# Altium PCB PCB_fin.PcbDoc
Units mil, origin at the board's own origin, x right, y up, seen from the top; angles counter-clockwise.
Board outline 4000 x 3500 mil, 2 copper layers (Top Layer, Bottom Layer); 13 components, 18 nets, 82 pads, 1 vias.
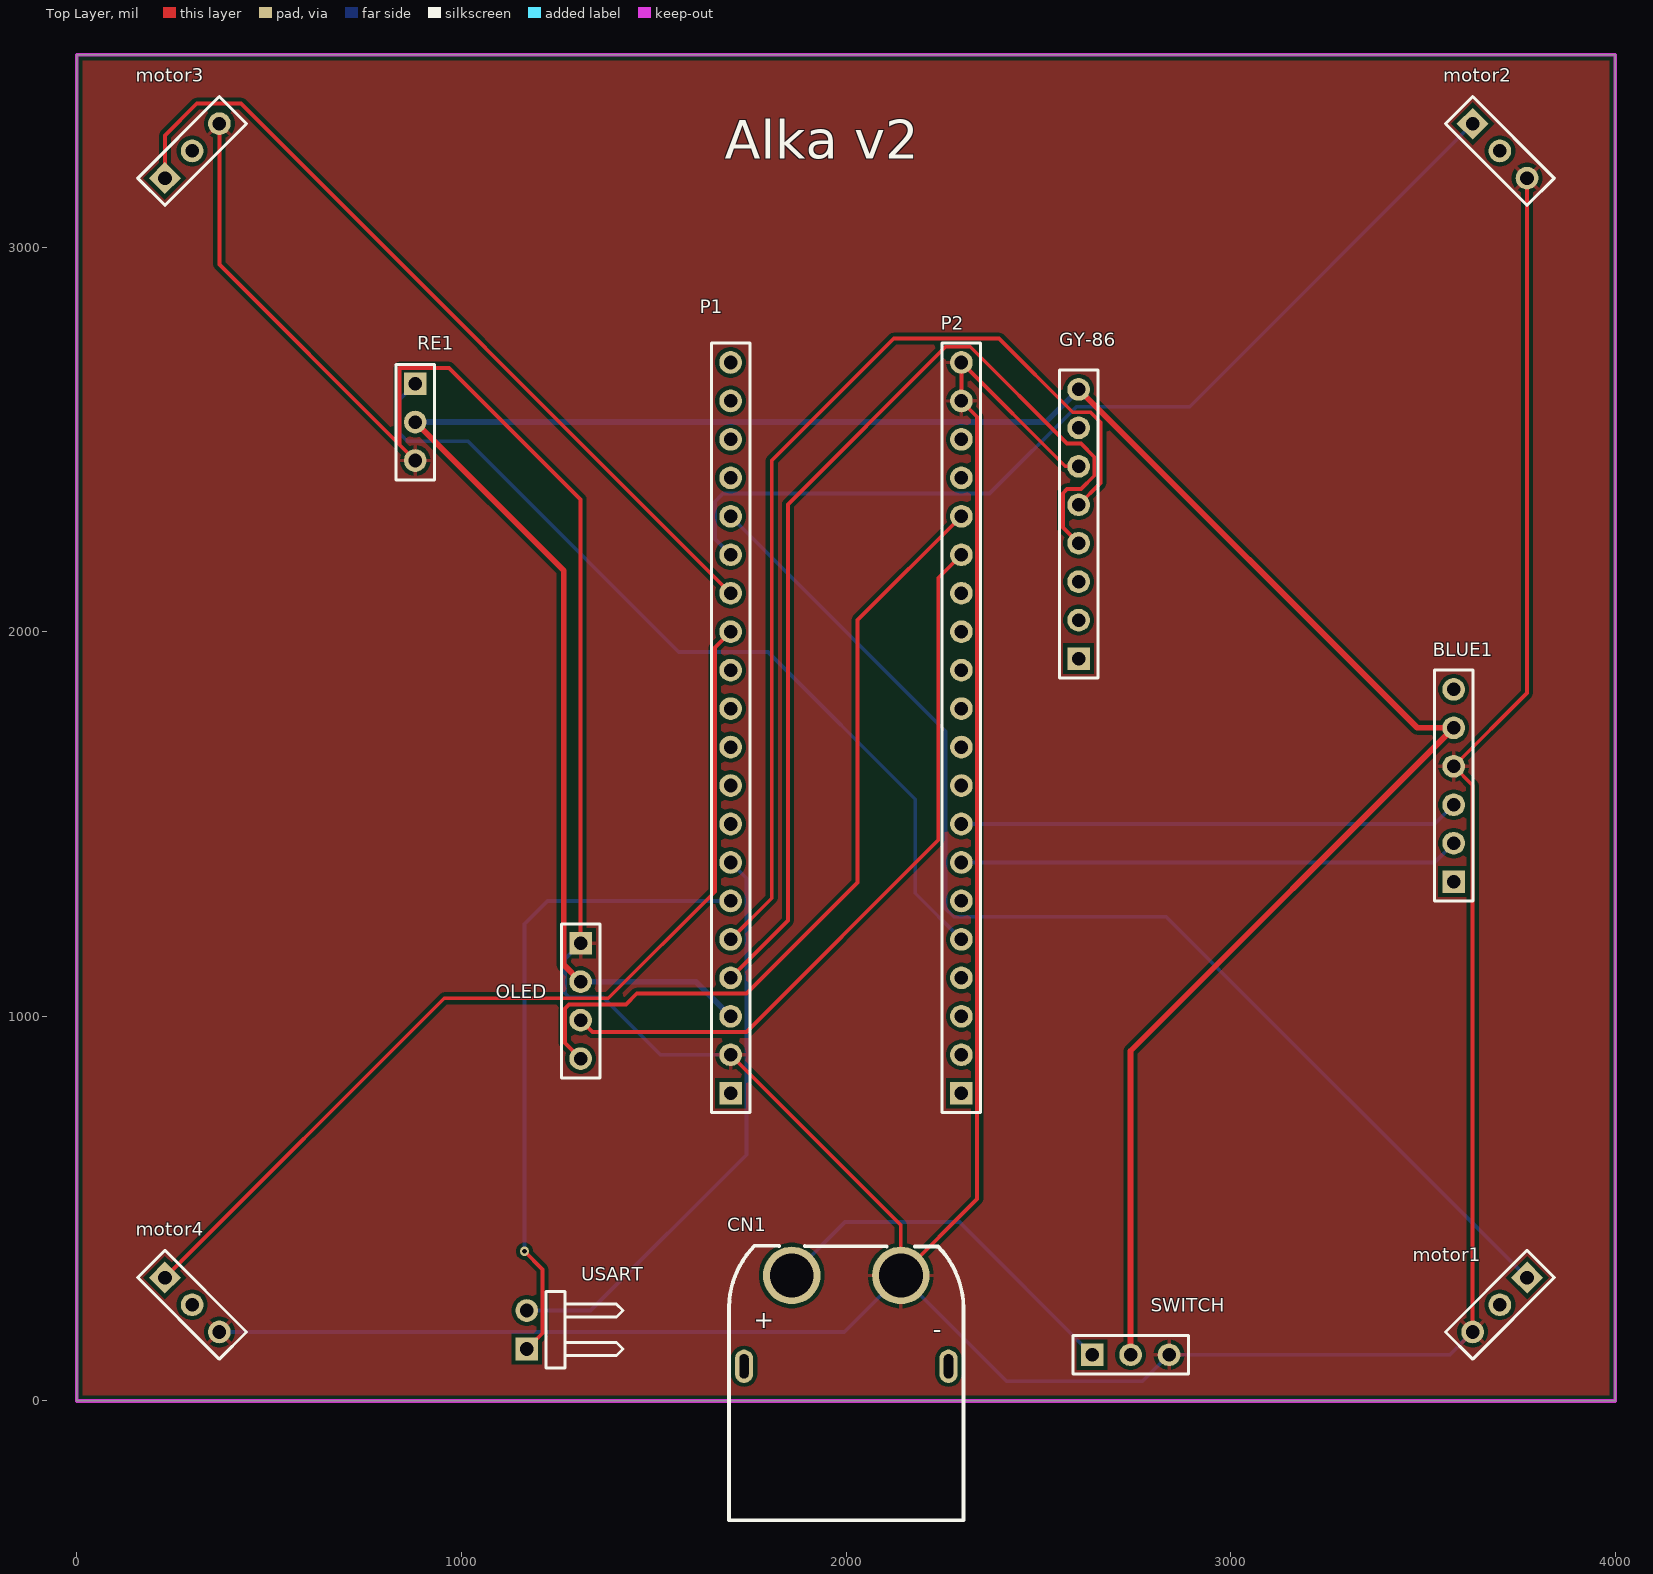
[diagram p0: Top Layer view]
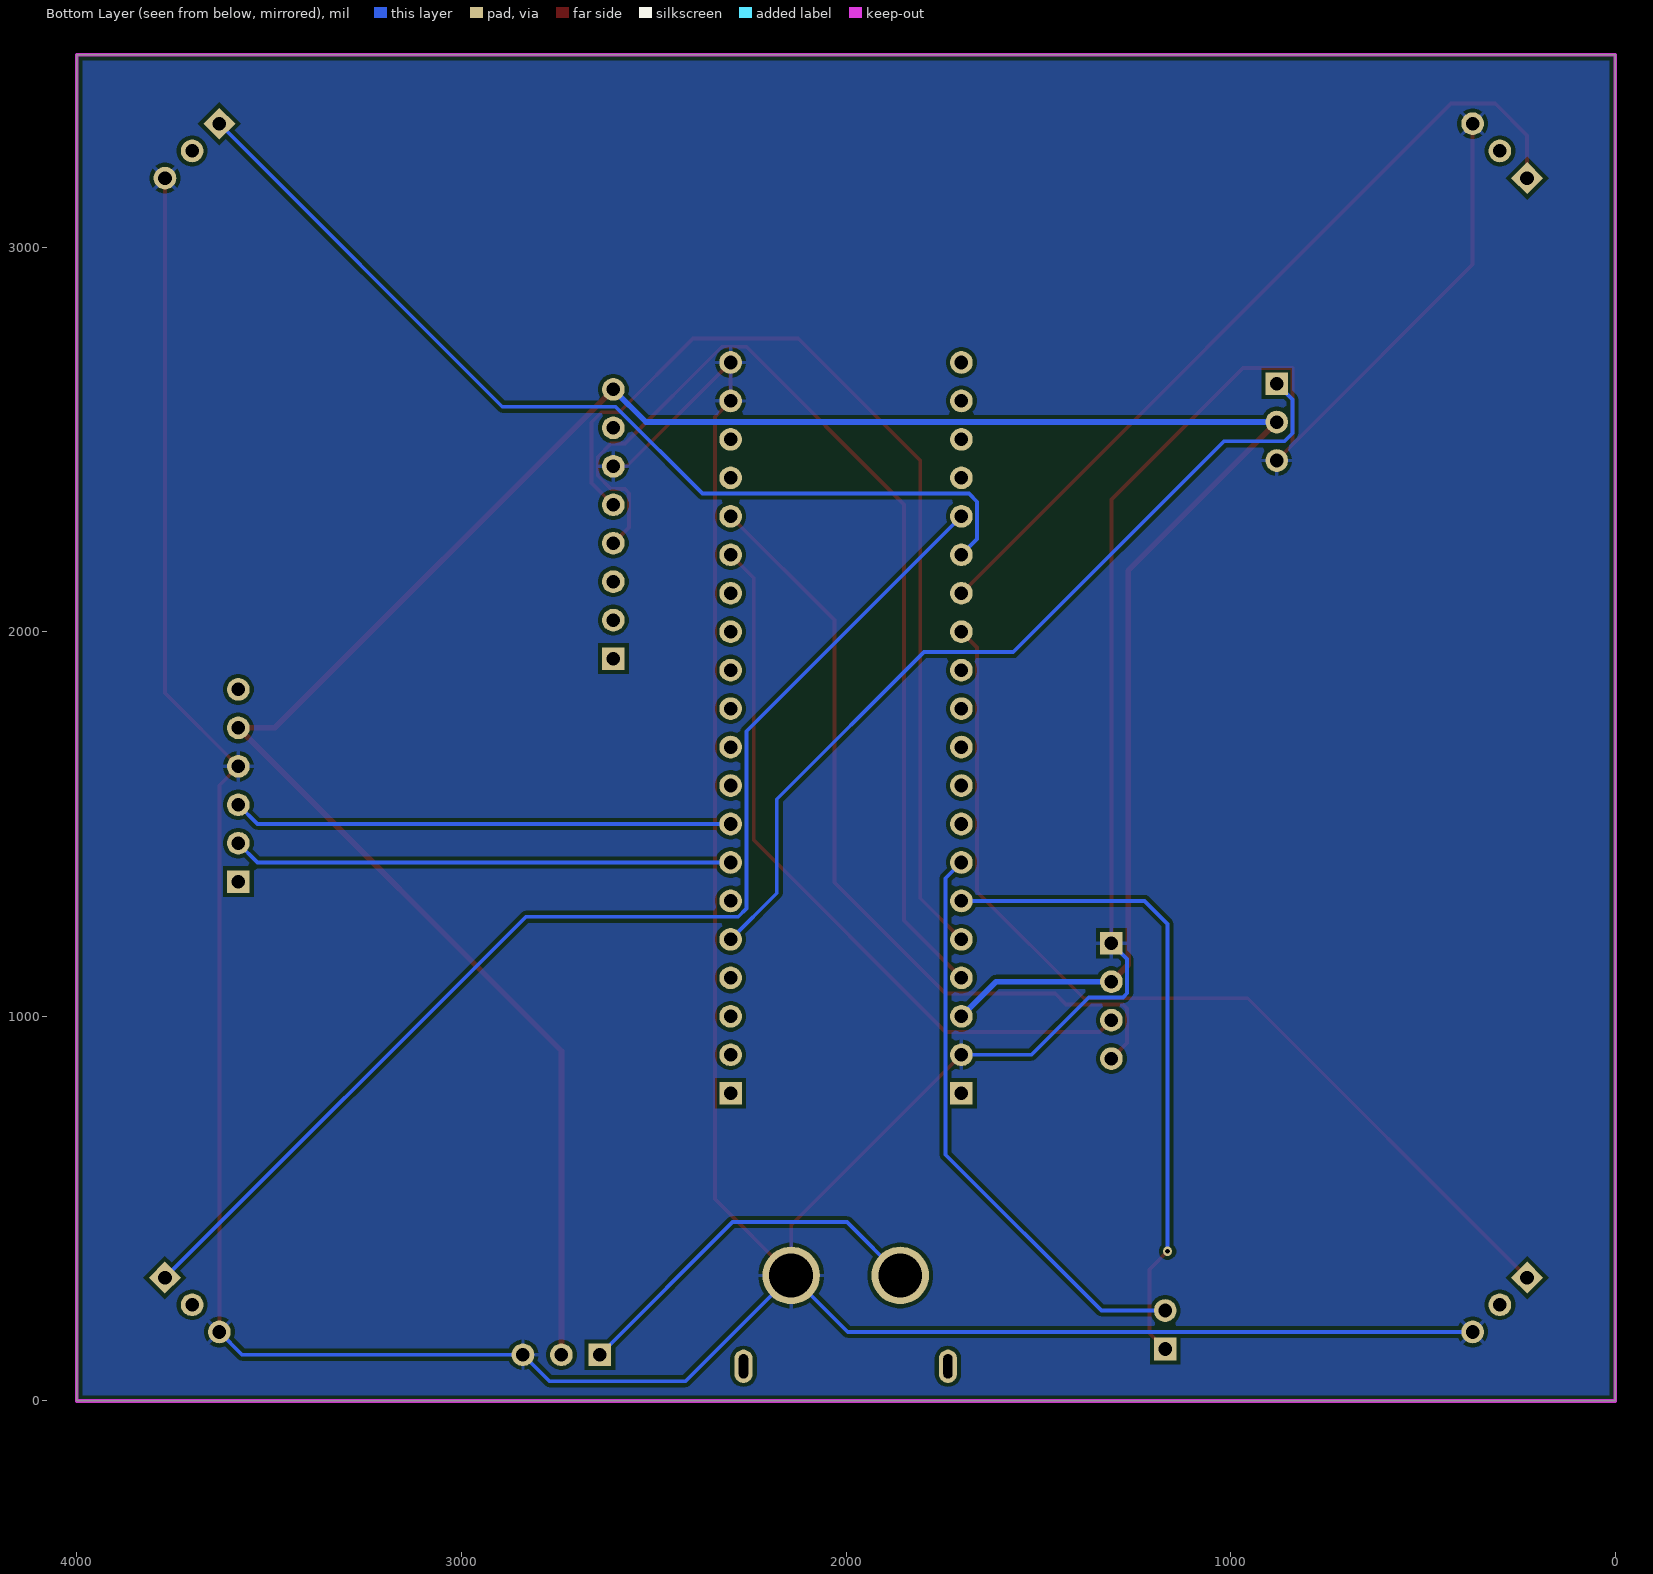
[diagram p1: Bottom Layer view, seen from below]

## Layer stack, top to bottom
Top Solder: solder mask 0.4, Solder Resist, Dk 3.5
Top Layer: signal copper 1.4
Dielectric 1: dielectric 12.6, FR-4, Dk 4.8
Bottom Layer: signal copper 1.4
Bottom Solder: solder mask 0.4, Solder Resist, Dk 3.5

## Board outline
0,0 4000,0 4000,3500 0,3500

## Design rules (kind name [scope] priority, off if disabled: settings)
Clearance [All] p1: gap=6 ignorepadtopadclearanceinfootprint=FALSE except(10: Arc-Poly Track-Poly SMDPad-Poly THPad-Poly Via-Poly Fill-Poly Poly-Poly)
HoleSize [All] p1: absolutevalues=TRUE maxlimit=150 minlimit=1 maxpercent=80.000 minpercent=20.000
MinimumSolderMaskSliver [All] p1: minsoldermaskwidth=0
PolygonConnect [All] p1: connectstyle=Relief reliefconductorwidth=10 reliefentries=4 polygonreliefangle="90 Angle" airgapwidth=10
RoutingVias [All] p1: holewidth=12 width=24 viastyle="Through Hole" minholewidth=12 minwidth=24 maxholewidth=28 maxwidth=50
SilkToSilkClearance [All] p1: silktosilkclearance=0
SilkToSolderMaskClearance [IsPad] p1: minsilkscreentomaskgap=0 clearancetoexposedcopper=TRUE
SolderMaskExpansion [All] p1: expansion=4 istentingtop=FALSE
SupplyNets "Schematic Supply Nets" [InNet('GND')] p1: voltage=0.000
Width Width_1 [(InNet('5V') OR InNet('3V3_1') OR InNet('3V3_2') OR InNet('3V3_1'))] p1: maxlimit=20 minlimit=10 preferedwidth=15
Width [All] p2: maxlimit=20 minlimit=10 preferedwidth=10
26 further rules are at their usual default settings.

## Components (designator, comment, footprint, x,y, rotation, side; value= is the part's Value field where it differs from the comment)
BLUE1 "bluetooth" HDR1X6 3580,1350 r90 top
CN1 "" PCBComponent_1 1918.11,-1705.22 r90 top
GY-86 "GY-86" HDR1X8 2605,1930 r90 top
motor1 "motor1" HDR1X3 3770.71,320.71 r225 top
motor2 "motor2" HDR1X3 3629.29,3320.71 r315 top
motor3 "motor3" HDR1X3 229.29,3179.29 r45 top
motor4 "motor4" HDR1X3 229.29,320.71 r315 top
OLED "OLED" HDR1X4 1310,1190 r270 top
P1 "Header 20_1" HDR1X20 1700,800 r90 top locked
P2 "Header 20_2" HDR1X20 2300,800 r90 top locked
RE1 "receiver" HDR1X3 880,2645 r270 top
SWITCH "SWITCH" HDR1X3 2640,120 r0 top
USART "Header 2H" HDR1X2H 1170,135 r90 top

## Footprints (in the part's own frame and the unit in brackets; to place one, negate y for a bottom-side part, rotate by r counter-clockwise, add the part's x,y. Pads: shape width x height; smd on the part's side, far side on the other; paste and mask are expansions set on the pad)
HDR1X2H [mm] "Connector; Header; 2 Position; Right Angle"
  rect 1.5x1.5 hole 0.9: 1(0,0)
  round 1.5 hole 0.9: 2(2.54,0)
  silkscreen extent -1.27,-6.35 3.81,-1.27
HDR1X3 [mm] "Connector; Header; 3 Position"
  rect 1.5x1.5 hole 0.9: 1(0,0)
  round 1.5 hole 0.9: 2(2.54,0) 3(5.08,0)
  silkscreen extent -1.27,-1.27 6.35,1.27
HDR1X4 [mm] "Connector; Header; 4 Position"
  rect 1.5x1.5 hole 0.9: 1(0,0)
  round 1.5 hole 0.9: 2(2.54,0) 3(5.08,0) 4(7.62,0)
  silkscreen extent -1.27,-1.27 8.89,1.27
HDR1X6 [mm] "Connector; Header; 6 Position"
  rect 1.5x1.5 hole 0.9: 1(0,0)
  round 1.5 hole 0.9: 2(2.54,0) 3(5.08,0) 4(7.62,0) 5(10.16,0) 6(12.7,0)
  silkscreen extent -1.27,-1.27 13.97,1.27
HDR1X8 [mm] "Connector; Header; 8 Position"
  rect 1.5x1.5 hole 0.9: 1(0,0)
  round 1.5 hole 0.9: 2(2.54,0) 3(5.08,0) 4(7.62,0) 5(10.16,0) 6(12.7,0) 7(15.24,0) 8(17.78,0)
  silkscreen extent -1.27,-1.27 19.05,1.27
HDR1X20 [mm] "Connector; Header; 20 Position"
  rect 1.5x1.5 hole 0.9: 1(0,0)
  round 1.5 hole 0.9: 2(2.54,0) 3(5.08,0) 4(7.62,0) 5(10.16,0) 6(12.7,0) 7(15.24,0) 8(17.78,0) 9(20.32,0) 10(22.86,0) 11(25.4,0) 12(27.94,0) 13(30.48,0) 14(33.02,0) 15(35.56,0) 16(38.1,0) 17(40.64,0) 18(43.18,0) 19(45.72,0) 20(48.26,0)
  silkscreen extent -1.27,-1.27 49.53,1.27
PCBComponent_1 [mm]
  round 3.8 hole 2.9 paste-2539.97 mask+0.05: 1(51.599,-5.699) 2(51.599,1.501)
  oval 2.2x1.2 hole 0.6 slot 1.6 at 0 deg paste-2539.97 mask+0.05: 3(45.599,4.651) 4(45.599,-8.849)
  silkscreen extent 35.43,-9.85 53.56,5.65

## Part data
BLUE1: library part "Header 6", "Header, 6-Pin", LatestRevisionDate=17-Jul-2002, LatestRevisionNote="Re-released for DXP Platform.", Publisher="Altium Limited"
CN1: library part Component_1
GY-86: library part "Header 8", "Header, 8-Pin", LatestRevisionDate=17-Jul-2002, LatestRevisionNote="Re-released for DXP Platform.", Publisher="Altium Limited"
motor1 motor2 motor3 motor4 RE1 SWITCH: library part "Header 3", "Header, 3-Pin", LatestRevisionDate=17-Jul-2002, LatestRevisionNote="Re-released for DXP Platform.", Publisher="Altium Limited"
OLED: library part "Header 4", "Header, 4-Pin", LatestRevisionDate=17-Jul-2002, LatestRevisionNote="Re-released for DXP Platform.", Publisher="Altium Limited"
P1 P2: library part "Header1* 20", LatestRevisionDate=17-Jul-2002, LatestRevisionNote="Re-released for DXP Platform.", Publisher="Altium Limited"
USART: "Header, 2-Pin, Right Angle", LatestRevisionDate=17-Jul-2002, LatestRevisionNote="Re-released for DXP Platform.", Publisher="Altium Limited"

## Via types
v1: diameter 24, hole 12, Top Layer to Bottom Layer, 1 vias

## Nets (pads, with @x,y where several pads share a name; then routed paths per layer and width w, separated by ;. In a path a pad name is that pad's centre, name@x,y a point inside that pad or via, vN(x,y) a via of type N, cw(c..) or ccw(c..) an arc to the next point about the centre after c; other vN are vias at no path point)
3V3_1: P2.18
3V3_2: P1.1
5V: BLUE1.5 GY-86.8 OLED.2 P1.3 RE1.2 SWITCH.2 | length 7138
  Top Layer w15: RE1.2 1266,2159 1266,1134 OLED.2 ; GY-86.8 3485,1750 BLUE1.5 2740,910 SWITCH.2
  Bottom Layer w15: RE1.2 2520,2545 GY-86.8 ; OLED.2 1610,1090 P1.3
GND: BLUE1.4 CN1.1 GY-86.6 motor1.3 motor2.3 motor3.3 motor4.3 OLED.1 P1.2 P2.19 P2.20 RE1.3 SWITCH.3 | length 13930.5
  Top Layer w10: motor3.3 370.71,2954.29 839,2486 ; RE1.3 839,2486 ; OLED.1 1310,2344 968,2686 839,2686 839,2486 ; P1.2 2142.48,457.52 CN1.1 2341,524.75 2341,2559 P2.19 P2.20 2570,2430 GY-86.6 ; motor1.3 3629.29,1600.71 BLUE1.4 3770.71,1840.71 motor2.3
  Bottom Layer w10: motor4.3 1995.54,179.29 CN1.1 2417.7,51 2771,51 SWITCH.3 3570,120 motor1.3 ; OLED.1 1269,1149 1269,1060 1280,1049 1369,1049 1518,900 P1.2
I2C1_SCL: GY-86.5 P1.5 | length 2603.1
  Top Layer w10: P1.5 1807,1307 1807,2445 2124,2762 2398,2762 2589.47,2570.53 2635.47,2570.53 2661.53,2544.47 2661.53,2386.53 GY-86.5
I2C1_SDA: GY-86.4 P1.4 | length 2674.1
  Top Layer w10: P1.4 1849,1249 1849,2331 2259,2741 2323,2741 2575,2489 2611,2489 2645.53,2454.47 2645.53,2405.53 2611,2371 2575,2371 2564,2360 2564,2271 GY-86.4
I2C2_SCL: OLED.3 P2.15 | length 1916.4
  Top Layer w10: OLED.3 1341,959 1741,959 2240,1458 2240,2140 P2.15
I2C2_SDA: OLED.4 P2.16 | length 2107.7
  Top Layer w10: OLED.4 1269,931 1269,1020 1280,1031 1428,1031 1456,1059 1741,1059 2030,1348 2030,2030 P2.16
P: CN1.2 SWITCH.1 | length 981.4
  Bottom Layer w10: CN1.2 1997.79,465 2295,465 SWITCH.1
PA0: P2.5 RE1.1 | length 2295.3
  Bottom Layer w10: RE1.1 839,2604 839,2516 860,2495 1017,2495 1565,1947 1797.52,1947 2180,1564.52 2180,1320 P2.5
TIM1_CH1: motor1.1 P1.16 | length 3160.6
  Bottom Layer w10: P1.16 2259,1741 2259,1280 2280,1259 2832.42,1259 motor1.1
TIM1_CH2: motor2.1 P1.15 | length 2532.3
  Bottom Layer w10: P1.15 1659,2241 1659,2338 1680,2359 2373,2359 2599,2585 2893.58,2585 motor2.1
TIM1_CH3: motor3.1 P1.14 | length 2143.3
  Top Layer w10: motor3.1 229.29,3290.29 312,3373 427,3373 P1.14
TIM1_CH4: motor4.1 P1.13 | length 2538.3
  Top Layer w10: motor4.1 955.58,1047 1382,1047 1659,1324 1659,1959 P1.13
USART1_RX: P1.6 USART.1 | length 1702.3
  Top Layer w10: v1(1164,389) 1211,342 1211,176 USART.1
  Bottom Layer w10: v1(1164,389) 1164,1240 1224,1300 P1.6
USART1_TX: P1.7 USART.2 | length 1515.7
  Bottom Layer w10: USART.2 1336,235 1741,640 1741,1359 P1.7
USART2_RX: BLUE1.3 P2.8 | length 1300.7
  Bottom Layer w10: P2.8 3530,1500 BLUE1.3
USART2_TX: BLUE1.2 P2.7 | length 1300.7
  Bottom Layer w10: P2.7 3530,1400 BLUE1.2
pads on no net: BLUE1.1 BLUE1.6 CN1.3 CN1.4 GY-86.1 GY-86.2 GY-86.3 GY-86.7 motor1.2 motor2.2 motor3.2 motor4.2 P1.8 P1.9 P1.10 P1.11 P1.12 P1.17 P1.18 P1.19 P1.20 P2.1 P2.2 P2.3 P2.4 P2.6 P2.9 P2.10 P2.11 P2.12 P2.13 P2.14 P2.17

## Polygon pours and split planes (outlines as drawn)
GND on Top Layer "GND_L01_P000" (solid, remove dead copper, pour order 0): 0,3500 4000,3500 4000,0 0,0
GND on Bottom Layer "GND_L02_P001" (solid, remove dead copper, pour order 1): 0,0 0,3500 4000,3500 4000,0

## Keep-outs
Keep-Out Layer:
  the board outline again, w10

## Silkscreen, mask and mechanical layers (free items; w line width, h text height)
Top Overlay:
  text "Alka v2" at 1685.21,3230.03 h100

## Text inside footprints (layer, text, board x,y; h text height)
CN1: Top Overlay "-" at 2248.75,213.4 h80 r180; Top Overlay "+" at 1813.75,242.96 h80 r180